# Altium PCB LM2576_BuckConverter.PcbDoc
Units mm, origin at the board's own origin, x right, y up, seen from the top; angles counter-clockwise.
Board outline 69.72 x 26.67 mm, 2 copper layers (Top Layer, Bottom Layer); 9 components, 6 nets, 23 pads, 9 vias.
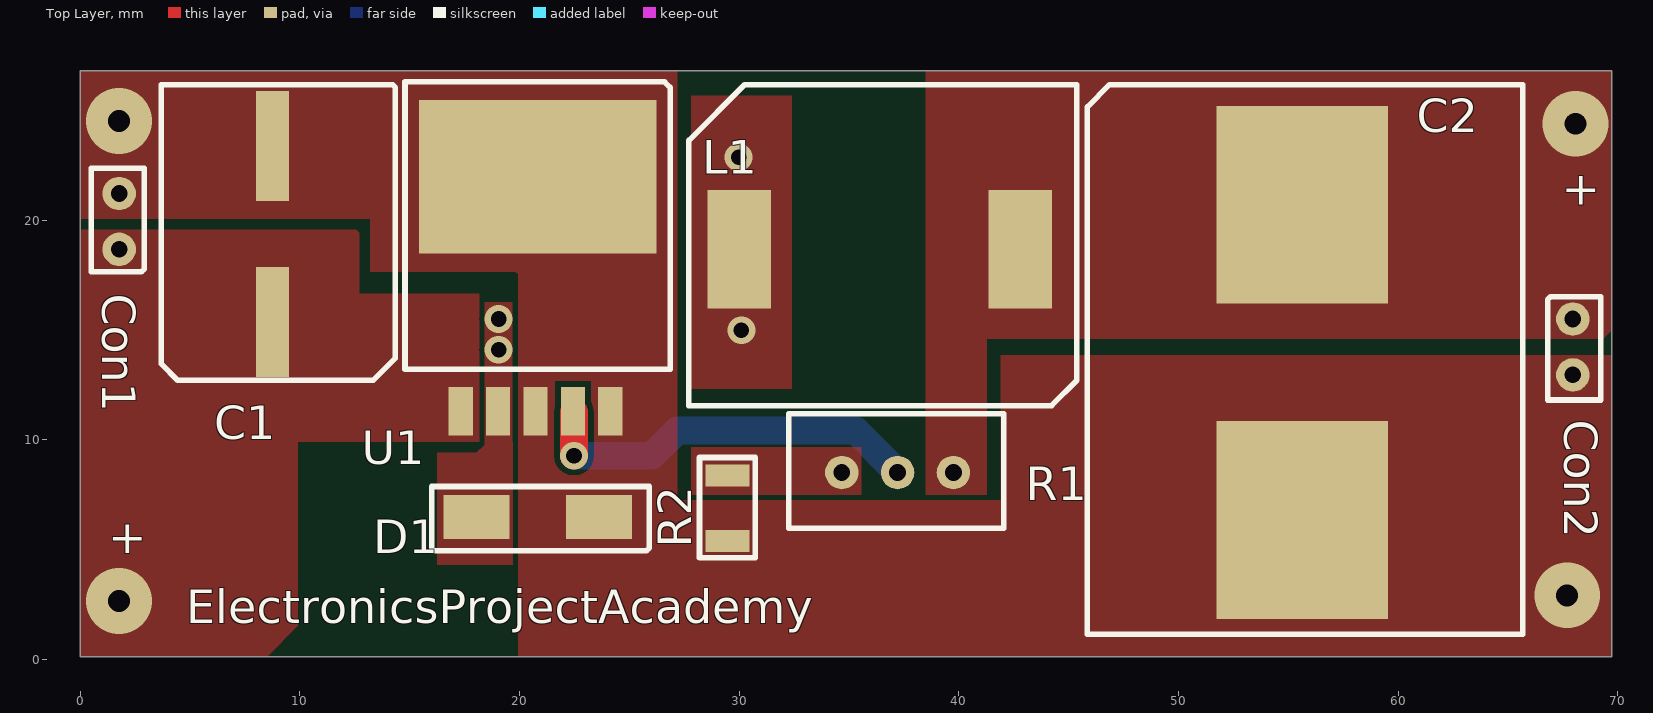
[diagram p0: Top Layer view]
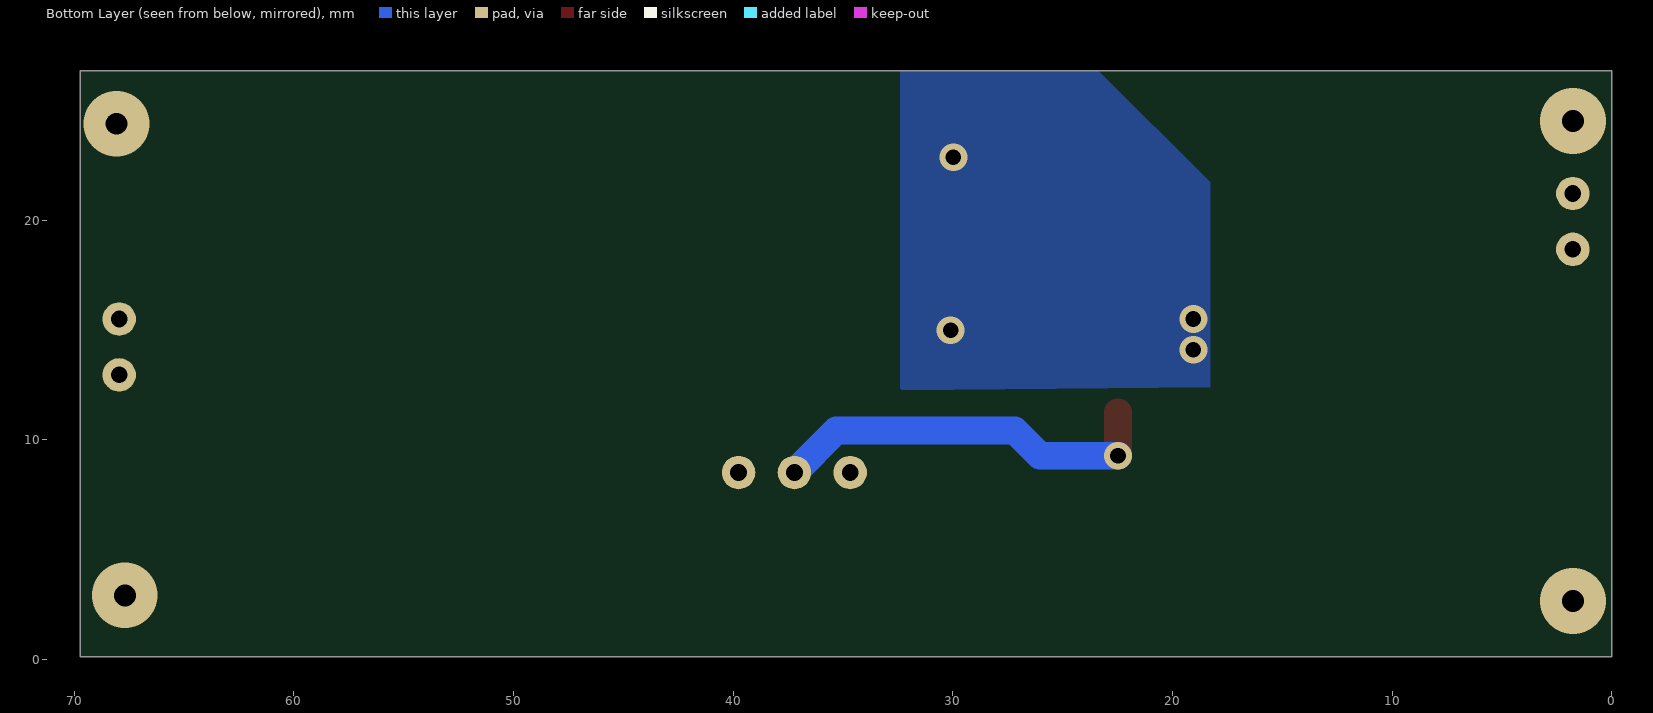
[diagram p1: Bottom Layer view, seen from below]
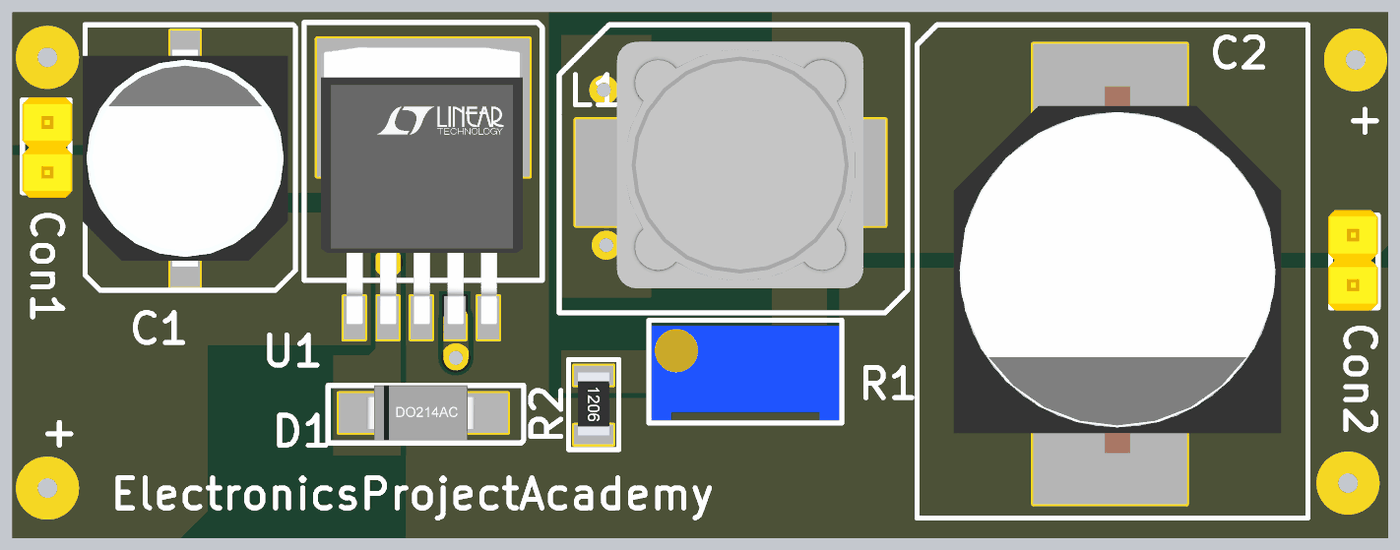
[diagram p2: 3D render of the assembled board from above, using the file's embedded part models]

## Layer stack, top to bottom
Top Solder: solder mask 0.0102, Solder Resist, Dk 3.5
Top Layer: signal copper 0.0356
Dielectric 1: dielectric 0.32, FR-4, Dk 4.8
Bottom Layer: signal copper 0.0356
Bottom Solder: solder mask 0.0102, Solder Resist, Dk 3.5

## Board outline
0,0.127 0,26.797 69.723,26.797 69.723,0.127

## Design rules (kind name [scope] priority, off if disabled: settings)
Clearance [All] p1: gap=0.254 ignorepadtopadclearanceinfootprint=FALSE except(0: Arc-Hole Track-Hole SMDPad-Hole THPad-Hole Via-Hole Fill-Hole Poly-Hole Region-Hole Text-Hole)
PolygonConnect [All] p1: connectstyle=Direct reliefconductorwidth=0.254 reliefentries=4 polygonreliefangle="90 Angle" airgapwidth=0.254
RoutingVias [All] p1: holewidth=0.711 width=1.27 viastyle="Through Hole" minholewidth=0.711 minwidth=1.27 maxholewidth=0.711 maxwidth=1.27
SolderMaskExpansion [All] p1: expansion=0.102 istentingtop=FALSE
Width [All] p1: maxlimit=2.54 minlimit=0.254 preferedwidth=0.254 minimp=50.000000 maximp=50.000000 favimp=50.000000
30 further rules are at their usual default settings.

## Components (designator, comment, footprint, x,y, rotation, side; value= is the part's Value field where it differs from the comment)
C1 "200uF" "220uF Capacitor" 8.763,15.367 r180 top
C2 "1000uF" "1000Uf Cap" 55.626,20.701 r0 top
Con1 "2pinconnector" 2pin 1.778,18.669 r180 top
Con2 "2pinconnector" 2pin 67.945,15.494 r0 top
D1 "1N5822" 1n5822 18.034,6.477 r0 top
L1 "150uH" "150uH Inductor" 29.999,18.669 r0 top
R1 "10K" "10K Pot" 37.211,8.509 r270 top
R2 "1K" "1K 1206 Res" 29.464,5.382 r90 top
U1 "LM2576" LM2576-TO63-5 17.328,11.301 r90 top

## Footprints (in the part's own frame and the unit in brackets; to place one, negate y for a bottom-side part, rotate by r counter-clockwise, add the part's x,y. Pads: shape width x height; smd on the part's side, far side on the other; paste and mask are expansions set on the pad)
"1K 1206 Res" [mm]
  rect 1x2 smd: 1(0,0) 2(3,0)
  silkscreen extent -0.76,-1.27 3.81,1.27, body extent -0.04,-0.8 3.16,0.8, height 0.56
1n5822 [mm]
  rect 3x2 smd: 1(0,0) 2(5.588,0)
  silkscreen extent -2.03,-1.52 7.87,1.4, body extent -0.08,-1.4 5.41,1.4, height 2.3
2pin [mil]
  round 60 hole 30: 1(0,0) 2(0,-100)
  silkscreen extent -45,-145 50,40, body extent -50,-150 50,50, height 374
"10K Pot" [mil]
  round 60 hole 30: 1(0,100) 2(0,0) 3(0,-100)
  silkscreen extent -105,-195 100,190, body extent -94,-190 94,185, height 455
"150uH Inductor" [mm]
  rect 2.9x5.4 smd: 1(0,0) 2(12.8,0)
  silkscreen extent -2.29,-7.11 15.37,7.49, body extent 0.64,-5.87 13.14,6.63, height 7.51
"220uF Capacitor" [mm]
  rect 1.5x5 smd: 1(0,0) 2(0,-8.001)
  silkscreen extent -5.59,-10.79 5.08,2.67, body extent -5.19,-9.53 5.21,1.47, height 10.41
"1000Uf Cap" [mm]
  rect 7.8x9 smd: 1(0,0) 2(0,-14.351)
  silkscreen extent -9.78,-19.56 10.03,5.46, body extent -7.92,-16.26 8.68,2.34, height 17.51
LM2576-TO63-5 [mm] "D2-PAK, 6-Pads, Body 7,42x8,51mm (max), IPC Medium Density"
  rect 2.2x1.1 smd: 1(0,0) 2(0,-1.7) 3(0,-3.4) 4(0,-5.1) 5(0,-6.8)
  rect 7x10.8 smd: 3(10.67,-3.5)
  silkscreen extent 1.91,-9.52 14.99,2.54, body extent -0.33,-8.54 13.72,1.68, height 4.38

## Part data
C1: library part "Electrolytic Cap 220uF"
C2: library part "Electrolytic Cap"
L1: library part "150uH L"
R1: library part "Variable Resistor"
R2: library part Resistor

## Via types
v1: diameter 1.27, hole 0.711, Top Layer to Bottom Layer, 5 vias
v2: diameter 3, hole 1, Top Layer to Bottom Layer, 4 vias

## Nets (pads, with @x,y where several pads share a name; then routed paths per layer and width w, separated by ;. In a path a pad name is that pad's centre, name@x,y a point inside that pad or via, vN(x,y) a via of type N, cw(c..) or ccw(c..) an arc to the next point about the centre after c; other vN are vias at no path point)
GND: C1.2 C2.2 Con1.2 Con2.2 D1.2 R2.1 U1.3 U1.5
  other v2: 67.691,2.921 1.778,24.511
NetC1_1: C1.1 Con1.1 U1.1
  other v2: 1.778,2.667
NetC2_1: C2.1 Con2.1 L1.2 R1.1
  other v2: 68.072,24.384
NetD1_1: D1.1 L1.1 U1.2
  other v1: 19.05,14.097 30.099,14.986 19.05,15.494 29.972,22.86
NetR1_2: R1.2 U1.4 | length 18
  Top Layer w0.254: U1.4 U1.4@22.479,11.25
  Top Layer w1.27: v1(22.479,9.271) U1.4@22.479,11.25
  Bottom Layer w1.27: v1(22.479,9.271) 26.035,9.271 27.178,10.414 35.306,10.414 R1.2
NetR1_3: R1.3 R2.2

## Polygon pours and split planes (outlines as drawn)
NetR1_3 on Top Layer "NETR1_3_L01_P010" (solid, pour order 10): 27.813,9.652 35.56,9.652 35.56,7.493 27.813,7.493
NetD1_1 on Top Layer "NETD1_1_L01_P009" (solid, pour order 9): 27.813,25.654 32.385,25.654 32.385,12.319 27.813,12.319
NetD1_1 on Top Layer "NETD1_1_L01_P007" (solid, pour order 7): 19.685,4.318 19.685,9.525 19.685,16.256 18.415,16.256 18.415,9.779 18.034,9.398 16.256,9.398 16.256,4.318
NetC2_1 on Top Layer "NETC2_1_L01_P003" (solid, pour order 3): 38.481,26.797 69.723,26.797 69.723,14.986 69.342,14.605 41.275,14.605 41.275,7.493 38.481,7.493
NetC1_1 on Top Layer "NETC1_1_L01_P002" (solid, pour order 2): 0,0.127 8.509,0.127 9.906,1.524 9.906,9.906 18.161,9.906 18.161,16.637 12.7,16.637 12.7,19.431 12.573,19.558 0,19.558
GND on Top Layer "GND_L01_P000" (solid, pour order 0): 19.812,17.653 19.939,17.526 19.939,9.906 19.939,0.127 69.723,0.127 69.723,13.843 41.91,13.843 41.91,7.239 27.178,7.239 27.178,26.797 0,26.797 0,20.066 13.208,20.066 13.208,17.653
NetD1_1 on Bottom Layer "NETD1_1_L02_P008" (solid, pour order 8): 18.288,12.382 18.288,21.717 23.368,26.797 32.385,26.797 32.385,12.254
no net on Bottom Layer "NONET_L02_P005" (solid, pour order 5): 29.612,12.65
no net on Bottom Layer "NONET_L02_P004" (solid, pour order 4): 21.463,12.7

## Silkscreen, mask and mechanical layers (free items; w line width, h text height)
Top Overlay:
  text "+" at 67.437,20.701 h1.52
  text "+" at 1.27,4.826 h1.52
  text "ElectronicsProjectAcademy" at 4.826,1.651 h1.52
Mechanical 1:
  the board outline again, w0.254